# EAGLE board circuit-new (EAGLE 7.5.0)
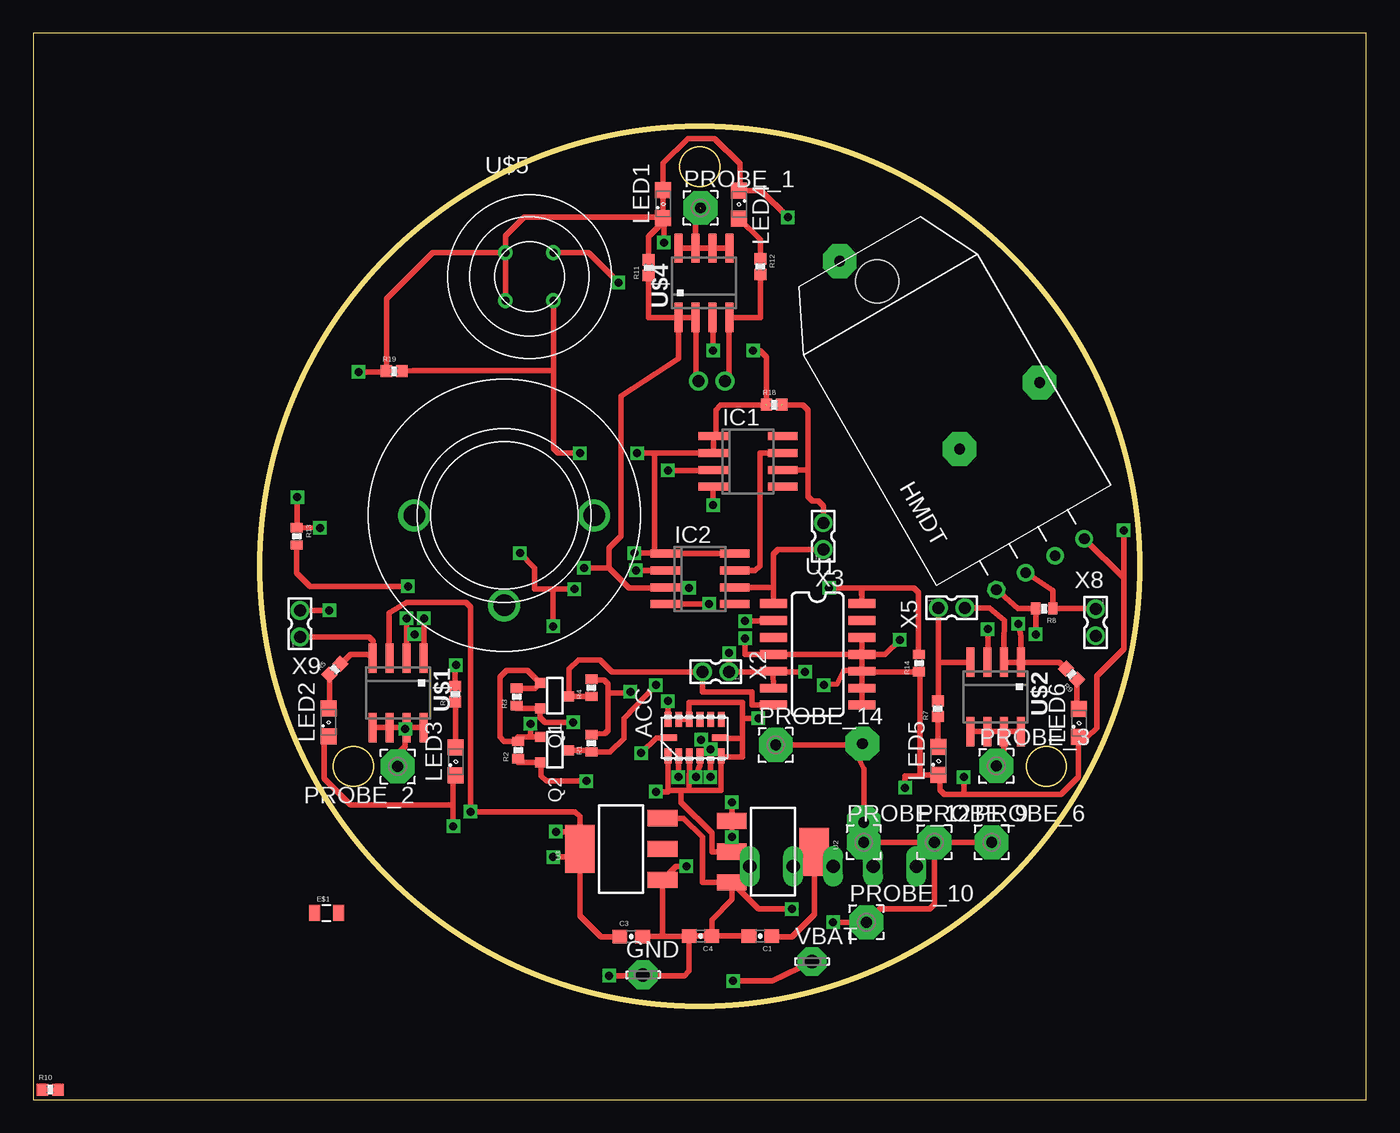
[diagram p0: board, top side]
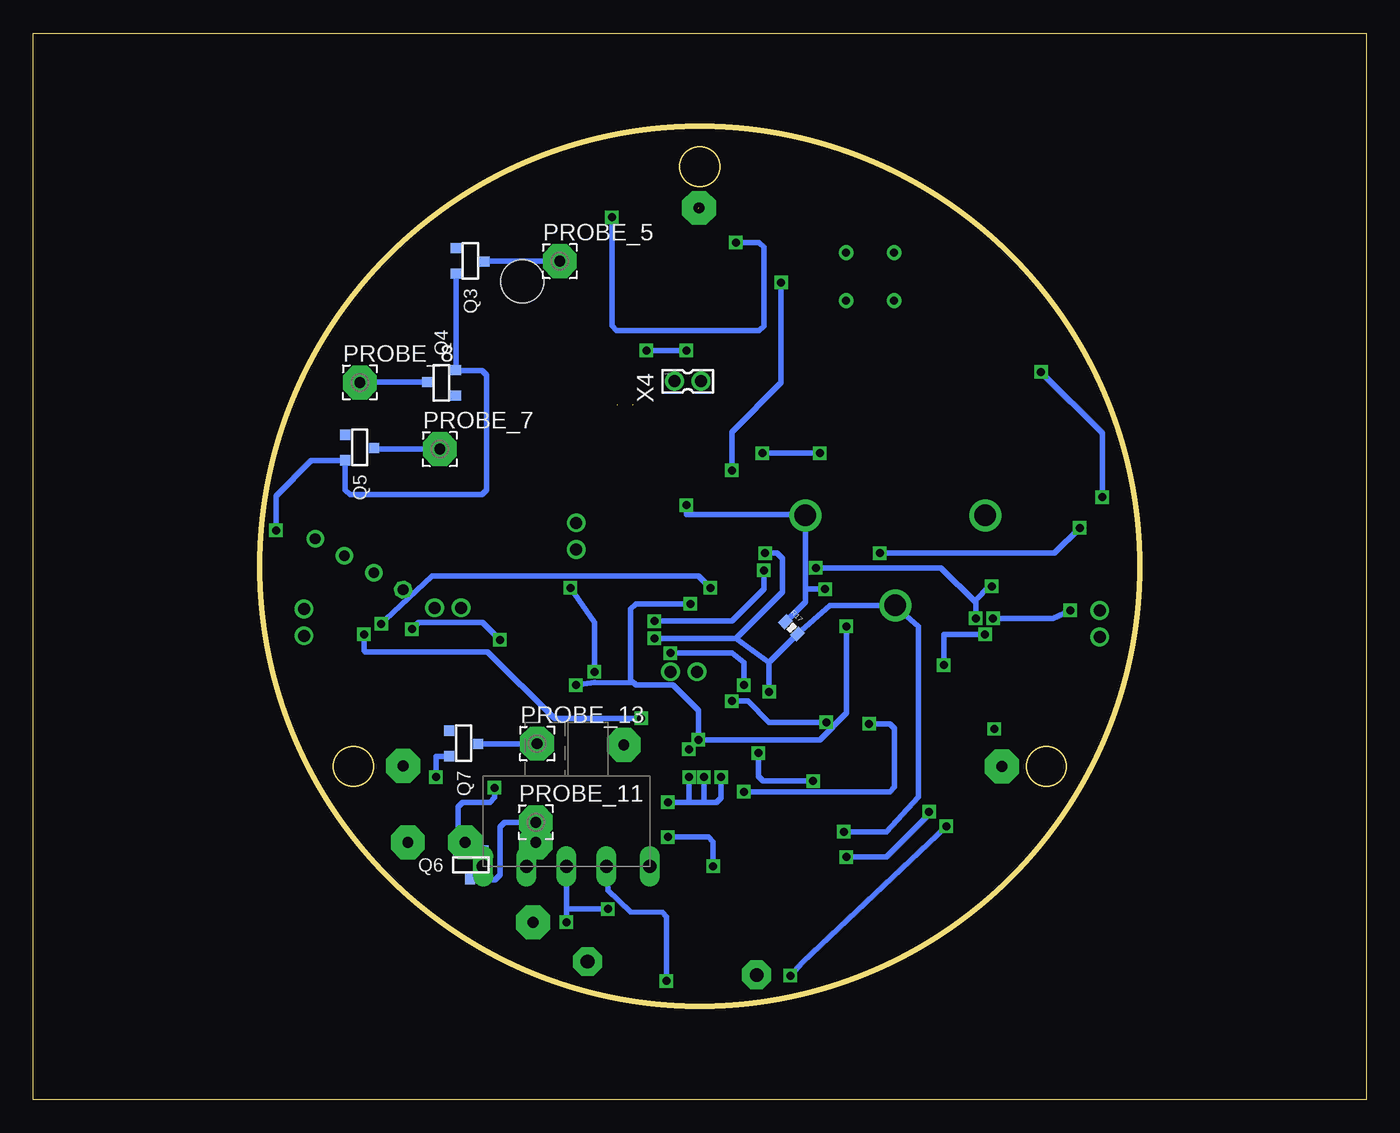
[diagram p1: board, bottom side, seen from below]

Size 100 x 80 mm. Coordinates in mm from the lower left corner, seen from the top.
Outline: 0,0 100,0 100,80 0,80 0,0
Outline: circle at 50,40 radius 33
Outline: circle at 50,70 radius 1.5
Outline: circle at 76,25 radius 1.5
Outline: circle at 24,25 radius 1.5
Copper layers (1*16): Top 0.035mm / dielectric 1.5mm / Bottom 0.035mm
Design rules "default *": minimum track width 0.5mm, minimum drill 1mm, track to track 8mil, track to pad 8mil, pad to pad 8mil, via to via 8mil, smd to smd 8mil, copper to edge 40mil, drill to drill 8mil, minimum pad ring 10mil, minimum via ring 8mil, stop-mask expansion 4mil, vias tented up to drill 0mil, thermal gap 10mil

## Footprints (pad centres in the part's own frame; a part is rotated, then mirrored left to right if it is on the bottom)
LGA_CC-14-1 = smd 1.118 x 0.5: 1 -1.371,2; 2 -1.371,1.2; 3 -1.371,0.4; 4 -1.371,-0.4; 5 -1.371,-1.2; 6 -1.371,-2; 8 1.371,-2; 9 1.371,-1.2; 10 1.371,-0.4; 11 1.371,0.4; 12 1.371,1.2; 13 1.371,2 | smd 0.5 x 1.118: 7 0,-1.871; 14 0,1.871
0603-CAP = smd 1.1 x 1: 1 -0.85,0; 2 0.85,0
0805 = smd 0.8 x 1.2: 1 -0.9,0; 2 0.9,0
LSP10 = drill 1.016 pad 2.159 octagon: MP 0,0
RHT03_DHT-22/RA = drill 0.8: DATA -1.27,0; GND 3.81,0; NULL 1.27,0 | drill 0.8 octagon: VDD -3.81,0 | hole 3.25: 0,24.5
SO08 = smd 0.6 x 2.2: 1 -1.905,-2.6; 2 -0.635,-2.6; 3 0.635,-2.6; 4 1.905,-2.6; 5 1.905,2.6; 6 0.635,2.6; 7 -0.635,2.6; 8 -1.905,2.6
SML0805 = smd 1.2 x 1.2: A 1.05,0; C -1.05,0
2,54/0,8 = drill 0.813 pad 2.54 octagon: 1 0,0
SOT-23 = smd 0.762 x 0.762: 1 -0.979,-1.101; 2 0.94,-1.101; 3 0.025,1.067
0402-RES = smd 0.7 x 0.9: 1 -0.65,0; 2 0.65,0
0402-RES' = smd 0.85 x 0.9: 1 -0.58,0; 2 0.58,0
SOIC-14 = smd 0.66 x 2.032: 1 -4.445,-3.315; 2 -3.175,-3.315; 3 -1.905,-3.315; 4 -0.635,-3.315; 5 0.635,-3.315; 6 1.905,-3.315; 7 3.175,-3.315; 8 3.175,3.315; 9 1.905,3.315; 10 0.635,3.315; 11 -0.635,3.315; 12 -1.905,3.315; 13 -3.175,3.315; 14 -4.445,3.315
SOT223 = smd 1.219 x 2.235: 1 -2.311,-3.099; 2 0,-3.099; 3 2.311,-3.099 | smd 3.6 x 2.2: 4 0,3.099
SOIC-8 = smd 0.6 x 2.2: 1 -1.905,-2.6; 2 -0.635,-2.6; 3 0.635,-2.6; 4 1.905,-2.6; 5 1.905,2.6; 6 0.635,2.6; 7 -0.635,2.6; 8 -1.905,2.6
TGS4161 = drill 0.6: 1 1.8,-1.8; 2 1.8,1.8; 3 -1.8,1.8; 4 -1.8,-1.8
O2-A2 = drill 1.6: GND 6.75,0; NC -6.75,0; VOUT 0,-6.75
SS-8 = drill 1 long: CASE_L -6.25,-3.81; CASE_R 6.25,-3.81; COM 0,-3.81; P1 -3,-3.81; P2 3,-3.81
87758-0216 = drill 0.9 pad 1.27: 1 0,-1; 2 0,1

## Placement (x,y rotation side)
ACC  ADXL375BCCZ  [LGA_CC-14-1]  49.62,27.14 90 top
C1  4.7pF  [0603-CAP]  54.54,12.27 180 top
C3  4.7pF  [0603-CAP]  44.85,12.23 0 top
C4  4.7pF  [0603-CAP]  50.06,12.27 180 top
E$1  [0805]  22,14 0 top
GND  LSP10  [LSP10]  45.74,9.35 0 top
HMDT  [RHT03_DHT-22/RA]  75.55,40.16 30 top
IC1  TLC271D  [SO08]  53.62,47.88 270 top
IC2  TLC271D  [SO08]  50.02,39.07 270 top
LED1  [SML0805]  47.25,67.19 90 top
LED2  [SML0805]  22.14,28.31 90 top
LED3  [SML0805]  31.69,25.35 90 top
LED4  [SML0805]  52.95,67.16 270 top
LED5  [SML0805]  67.91,25.4 90 top
LED6  [SML0805]  78.45,28.24 90 top
PROBE_1  [2,54/0,8]  50.06,66.9 0 top
PROBE_2  [2,54/0,8]  27.34,24.98 180 top
PROBE_3  [2,54/0,8]  72.25,25.02 0 top
PROBE_5  [2,54/0,8]  60.5,62.9 0 bottom
PROBE_6  [2,54/0,8]  71.9,19.3 0 top
PROBE_7  [2,54/0,8]  69.5,48.8 0 bottom
PROBE_8  [2,54/0,8]  75.5,53.8 0 bottom
PROBE_9  [2,54/0,8]  67.6,19.3 0 top
PROBE_10  [2,54/0,8]  62.5,13.3 0 top
PROBE_11  [2,54/0,8]  62.3,20.8 0 bottom
PROBE_12  [2,54/0,8]  62.3,19.3 0 top
PROBE_13  [2,54/0,8]  62.2,26.7 0 bottom
PROBE_14  [2,54/0,8]  55.7,26.6 0 top
Q1  [SOT-23]  39.13,30.28 270 top
Q2  [SOT-23]  39.13,26.23 270 top
Q3  [SOT-23]  67.2,62.9 270 bottom
Q4  [SOT-23]  69.4,53.8 90 bottom
Q5  [SOT-23]  75.5,48.9 270 bottom
Q6  [SOT-23]  67.2,17.6 180 bottom
Q7  [SOT-23]  67.7,26.7 270 bottom
R1  10k  [0402-RES]  41.87,26.73 90 top
R2  10k  [0402-RES]  36.37,26.22 90 top
R3  10k  [0402-RES]  36.27,30.21 90 top
R4  10k  [0402-RES]  41.87,30.9 90 top
R5  10  [0402-RES']  22.64,32.27 45 top
R6  10  [0402-RES']  31.65,30.42 90 top
R7  10  [0402-RES']  67.86,29.33 90 top
R8  10k  [0402-RES]  75.84,36.83 180 top
R9  10  [0402-RES']  77.89,31.91 135 top
R10  10  [0402-RES']  1.27,0.74 0 top
R11  10  [0402-RES']  46.16,62.41 90 top
R12  10  [0402-RES']  54.54,62.5 270 top
R13  [0402-RES]  19.77,42.26 270 top
R14  [0402-RES]  66.46,32.75 90 top
R17  [0402-RES]  43.11,35.39 315 bottom
R18  10  [0402-RES']  55.58,52.14 0 top
R19  10  [0402-RES']  27.07,54.64 0 top
U1  AD5241BRU1M-REEL7AD5241BRZ1M  [SOIC-14]  58.85,32.77 270 top
U2  [SOT223]  55.5,18.6 270 top
U3  [SOT223]  44.1,18.8 90 top
U$1  AO4606  [SOIC-8]  27.36,30.5 180 top
U$2  AO4606  [SOIC-8]  72.2,30.21 180 top
U$4  AO4606  [SOIC-8]  50.32,61.28 0 top
U$5  TGS4161  [TGS4161]  37.22,61.75 0 top
U$6  O2-A2  [O2-A2]  35.33,43.83 0 top
U$9  SS-8  [SS-8]  60,21.3 0 bottom
VBAT  LSP10  [LSP10]  58.42,10.35 0 top
X2  87758-0216  [87758-0216]  51.2,32.1 90 top
X3  87758-0216  [87758-0216]  59.27,42.27 0 top
X4  87758-0216  [87758-0216]  50.9,53.9 270 bottom
X5  87758-0216  [87758-0216]  68.9,36.9 270 top
X8  87758-0216  [87758-0216]  79.7,35.8 180 top
X9  87758-0216  [87758-0216]  20,35.7 0 top

## Library data of the parts
ACC Q3-Q7 U1-U3 U$1 U$2 U$4 U$9 = elements
C1 C3 C4 = SparkFun-Capacitors; PROD_ID: CAP-07880
E$1 R5-R7 R9-R12 R18 R19 = SparkFun-Resistors
GND VBAT = solpad
HMDT = RHT03_DHT-22_AM2302; PROD_ID: SEN-10167
IC1 IC2 = linear
LED1-LED6 = led
PROBE_1-PROBE_3 PROBE_5-PROBE_14 = wirepad
Q1 Q2 = transistors
R1-R4 R8 R13 R14 R17 = SparkFun-Passives
U$5 U$6 = datchiki
X2-X5 X8 X9 = con-molex; MPN: 87758-0216; OC_FARNELL: unknown; OC_NEWARK: 94M1513

## Nets
3.3V: ACC.1 ACC.3 ACC.6 ACC.7 ACC.11 ACC.12 C1.1 HMDT.VDD Q1.1 Q2.1 R2.2 R3.2 R8.2 U2.2 U2.4
5V: C3.1 IC1.1 IC1.2 IC2.1 IC2.8 R1.2 R4.2 R17.2 R18.1 R19.2 U1.4 U1.8 U1.9 U1.11 U3.2 U3.4 U$1.3 U$2.3 U$4.3 U$5.1 U$6.VOUT
GND: ACC.2 ACC.4 ACC.5 C1.2 C3.2 C4.2 GND.MP HMDT.GND IC1.4 IC2.4 LED1.C LED2.C LED3.C LED4.C LED5.C LED6.C Q3.2 Q4.2 Q5.2 Q6.2 Q7.2 R13.1 R14.1 R17.1 R19.1 U1.10 U2.1 U3.1 U$5.3 U$5.4 U$6.GND
N$1: LED4.A R12.1
N$2: PROBE_2.1 U$1.5 U$1.6 U$1.7 U$1.8
N$3: HMDT.DATA R8.1 X8.1
N$4: LED1.A R11.1
N$5: IC2.3 R13.2 U$1.1 U$2.1 U$4.1
N$6: R11.2 U$4.2 X4.2
N$7: R12.2 U$4.4 X4.1
N$8: LED2.A R5.1
N$9: R9.2 U$2.2 X5.2
N$10: LED3.A R6.1
N$11: R5.2 U$1.4 X9.1
N$12: LED5.A R7.1
N$13: R7.2 U$2.4 X5.1
N$14: LED6.A R9.1
N$16: PROBE_1.1 U$4.5 U$4.6 U$4.7 U$4.8
N$17: R6.2 U$1.2 X9.2
N$18: PROBE_5.1 Q3.3
N$20: IC2.6 U1.1 X3.1
N$21: PROBE_3.1 U$2.5 U$2.6 U$2.7 U$2.8
N$22: IC1.3 U$5.2
N$23: PROBE_8.1 Q4.3
N$24: IC1.6 R18.2 X3.2
N$26: IC2.2 U1.2
N$27: PROBE_7.1 Q5.3
N$28: R14.2 U1.5 U1.14
N$29: PROBE_11.1 Q6.3
N$30: PROBE_13.1 Q7.3
N$33: U$9.P2 VBAT.MP
SCL_3.3V: ACC.14 Q2.2 R2.1
SCL_5V: Q2.3 R1.1 U1.6 X2.1
SDA_3.3V: ACC.13 Q1.2 R3.1
SDA_5V: Q1.3 R4.1 U1.7 X2.2
V+: IC1.7 IC2.7
VBAT: C4.1 PROBE_6.1 PROBE_9.1 PROBE_10.1 PROBE_12.1 PROBE_14.1 U2.3 U3.3 U$9.COM

## Tracks (layer width: path | path; a pad name or v marks a point on that pad's centre or on a via)
3.3V  (via drill 0.6)
  Top 0.406: Q2.1 37.3,27.21 | 37.3,27.21 36.37,27.21 R2.2 35.33,26.87 35,27.2 35,31.7 35.5,32.2 37.09,32.2 Q1.1 37.63,30.86 R3.2 | ACC.7 51.49,27.1 53.2,27.1 | ACC.12 ACC.11 49.2,28.51 49.2,29.8 53.2,29.8 53.2,28.6 | HMDT.VDD 73.88,36.84 R8.2 v75.2,34.9 | U2.4 58.6,13.9 56.9,12.2 55.46,12.2 C1.1 | v46.7,23.1 47.62,23.1 47.62,23.2 | v37.3,28.2 37.3,27.21 | ACC.1 47.62,23.2 | U2.2 50.9,18.6 50.9,20 48.6,22.3 48.6,23.2 | ACC.3 49.2,23.2 | 49.2,23.2 48.6,23.2 | 48.6,23.2 47.62,23.2 | 49.2,23.2 51.6,23.2 51.6,25.75 ACC.6 51.62,25.7 53.2,25.7 53.2,27.1 | 53.2,27.1 53.2,28.6 | 53.2,28.6 v54.4,28.6
  Bottom 0.406: v46.7,23.1 35.75,23.1 35.4,23.45 35.4,27.85 35.75,28.2 v37.3,28.2 | v54.4,28.6 60.9,28.6 65.9,33.6 75.1,33.6 75.2,33.7 v75.2,34.9
5V  (via drill 0.6)  (1 unrouted)
  Top 0.406: R1.2 42.88,27.48 43.1,27.7 43.1,30.5 | 43.1,30.5 43.1,31.2 42.8,31.5 41.92,31.5 R4.2 | IC2.8 IC2.1 47.4,41 46.6,41 | U$1.3 26.7,33.13 26.7,36.5 28,37.3 32.45,37.3 32.8,36.95 v32.8,21.6 40.65,21.6 41,21.25 41,20.1 | 39.02,54.7 U$5.1 | 39.02,54.7 28.49,54.7 R19.2 | v39.2,20.1 41,20.1 | 41,20.1 41.7,20.1 | v44.8,30.6 44.7,30.5 43.1,30.5 | U1.8 U1.9 U1.11 | 41,18.2 41,13.8 42.6,12.2 43.97,12.2 C3.1 | 41,18.2 41,18.3 | 41,18.3 U3.4 | v51,56.2 51,58.63 U$4.3 | 40.9,18.4 41,18.3 | U1.11 U1.4 53.41,33.41 v53.4,34.6 | U1.11 62.16,34.6 | v39,18.2 41,18.2 | v54,56.2 54.5,56.2 55,55.7 55,52.1 51.55,52.1 51.2,51.75 51.2,49.78 IC1.1 IC1.2 51.02,48.5 46.6,48.5 | v45.1,41 46.6,41 | 46.6,48.5 46.6,41 | U1.11 63.91,33.41 v65,34.5 | v71.6,35.3 71.6,32.84 U$2.3 | 39.02,54.7 39.02,48.85 39.37,48.5 v41,48.5 | v45.3,48.5 46.6,48.5
  Bottom 0.406: 35.38,37.08 40.23,37.08 R17.2 44.8,32.78 | v39.2,20.1 36,20.1 33.6,22.7 33.6,35.5 35.38,37.08 | 44.8,32.78 v44.8,30.6 | U$6.VOUT 35.38,37.08 | v32.8,21.6 32.8,21.4 36,18.2 v39,18.2 | v54,56.2 v51,56.2 | v53.4,34.6 47.3,34.6 | 47.3,34.6 43.8,38.1 43.8,40.6 44.2,41 v45.1,41 | v65,34.5 66.3,35.8 71.1,35.8 v71.6,35.3 | 44.8,32.78 47.3,34.6 | v41,48.5 v45.3,48.5
GND  (via drill 0.6)
  Top 0.406: 69.8,22.9 77.1,22.9 78.4,24.2 78.4,27.1 78.49,27.19 LED6.C 79.09,27.19 79.8,27.9 79.8,31.8 81.8,33.8 81.8,39.12 | 69.8,22.9 68.35,22.9 68,23.25 68,24.35 LED5.C | LED2.C 21.8,27.26 21.8,24.1 23.8,22.1 31.5,22.1 | 31.5,22.1 31.5,24.11 LED3.C | C1.2 C4.2 | 48.4,26.1 ACC.2 48.4,25.77 v48.4,24.2 | U$5.3 29.95,63.55 26.49,60.09 R19.1 26.45,54.6 v24.4,54.6 | HMDT.GND 81.8,39.12 | v31.5,20.5 31.5,22.1 | 66.5,24.35 66.5,32.06 R14.1 62.16,32.1 U1.10 62.1,32.2 60.8,32.2 60.3,31.2 v59.3,31.1 | LED5.C 67.86,24.3 | 66.5,24.3 66.55,24.35 | 66.55,24.35 LED5.C | 66.5,24.35 66.55,24.35 | v49,17.5 48.21,17.5 U3.1 47.2,12.33 47.3,12.23 | C3.2 47.3,12.23 | 47.3,12.23 49.17,12.23 C4.2 | C4.2 49.21,9.65 48.86,9.3 45.74,9.3 | v43.2,9.3 45.74,9.3 | 45.74,9.3 GND.MP | ACC.5 50.8,25.75 | ACC.5 50.82,24.9 v50.8,24.2 | v52.4,19.7 U2.1 v52.4,22.3 | ACC.4 50.02,25.12 49.7,24.3 v49.7,24.2 | v51,44.6 51,45.98 IC1.4 | v19.8,45.2 19.8,42.93 R13.1 v21.5,42.9 | v69.8,24.2 69.8,22.9 | v65.4,23.4 65.4,24.3 66.5,24.3 | 66.5,24.3 66.5,24.35 | v81.8,42.7 81.8,39.12 | ACC.5 v50.82,26.28 v50.1,27 | v39,35.5 39,38.3 | 39,38.3 v40.6,38.3 | v50.7,37.2 50.66,37.16 IC2.4 | v36.5,41 37.6,39.9 37.6,38.3 39,38.3 | U$5.3 U$5.4 | U$5.3 35.42,64.82 36.8,66.2 47.19,66.2 LED1.C | LED1.C 47.25,65.95 47.4,65.8 | LED4.C 54.59,68.21 v56.6,66.2 | v47.3,64.3 47.3,66.14 LED1.C
  Bottom 0.406: v43.2,9.3 42.3,10.3 v31.5,20.5 | v49,17.5 49,19.35 49.35,19.7 v52.4,19.7 | v50.8,24.2 50.8,22.3 | 50.8,22.3 49.7,22.3 | 49.7,22.3 48.75,22.3 48.4,22.65 v48.4,24.2 | v49.7,24.2 49.7,22.3 | 50.8,22.3 v52.4,22.3 | 42.08,38.3 U$6.GND 42.15,43.9 51,43.9 v51,44.6 | 42.08,38.3 42.08,37.34 R17.1 | v24.4,54.6 19.8,50 v19.8,45.2 | Q7.2 69.8,25.76 v69.8,24.2 | v65.4,23.4 65.4,22.65 65.75,22.3 67.79,22.3 68.14,21.95 Q6.2 | Q3.2 Q4.2 68.3,54.7 66.35,54.7 66,54.35 66,45.75 66.35,45.4 76.25,45.4 76.6,45.75 Q5.2 79.14,47.96 81.8,45.3 v81.8,42.7 | v50.1,27 41,27 39,29 v39,35.5 | v40.6,38.3 42.08,38.3 | v50.82,26.28 v50.1,27 | v50.1,27 50.1,29.2 52,31.1 54.8,31.1 54.95,31.25 | 54.95,31.25 55.2,31.5 55.2,36.8 54.8,37.2 v50.7,37.2 | v59.3,31.1 57.9,31.3 54.95,31.25 | v21.5,42.9 23.4,41 v36.5,41 | v56.6,66.2 56.6,58.05 56.25,57.7 45.55,57.7 45.2,58.05 45.2,63.95 45.55,64.3 v47.3,64.3
N$1
  Top 0.406: R12.1 54.54,64.52 LED4.A
N$2  (via drill 0.6)
  Top 0.406: U$1.5 U$1.6 U$1.7 | U$1.7 U$1.8 | PROBE_2.1 27.34,25.94 27.9,26.5 v27.9,27.8 U$1.7
N$3
  Top 0.406: HMDT.DATA 76.49,38.19 R8.1 79.67,36.84 X8.1
N$4
  Top 0.406: R11.1 46.15,64.75 47.3,65.9 47.25,65.95 LED1.A 47.25,70.25 49.1,72.1 51.1,72.1 53,70.2 53,68.3
N$5  (via drill 0.6)
  Top 0.406: 43.2,39.9 44.7,38.4 47.42,38.4 IC2.3 47.45,38.4 v49.2,38.4 | 43.2,39.9 v41.3,39.9 | v29.3,36.1 29.3,33.13 U$1.1 | U$4.1 48.4,58.66 48.4,55.6 44.1,52.8 44.1,42.3 43.2,41.4 43.2,39.9 | U$2.1 74.1,34.8 v73.9,35.7 | R13.2 19.77,39.5 20.77,38.5 v28.1,38.5
  Bottom 0.406: v41.3,39.9 31.9,39.9 29.3,37.3 | 29.3,37.3 v29.3,36.1 | v49.2,38.4 50.1,39.3 70.1,39.3 73.6,36 v73.9,35.7 | v28.1,38.5 28.3,38.5 29.3,37.5 29.3,37.3
N$6
  Top 0.406: R11.2 46.16,58.68 U$4.2 49.7,58.66 49.7,53.9 X4.2
N$7
  Top 0.406: U$4.4 54.54,58.68 R12.2 | U$4.4 54.48,58.68 54.5,58.7 | X4.1 52.2,53.9 52.2,58.66 U$4.4
N$8
  Top 0.406: LED2.A 22.23,29.36 R5.1
N$9
  Top 0.406: R9.2 77,32.81 U$2.2 72.83,34.17 72.85,35.95 71.75,36.9 X5.2
N$10
  Top 0.406: LED3.A 31.69,29.8 R6.1
N$11
  Top 0.406: R5.2 23.08,32.68 23.8,33.4 25.16,33.4 U$1.4 25.5,33.14 25.5,34.4 25.2,34.7 X9.1
N$12
  Top 0.406: 67.5,26.8 LED5.A 67.86,26.5 R7.1
N$13
  Top 0.406: R7.2 67.9,29.95 67.9,32.8 | U$2.4 67.92,32.81 67.9,32.8 | X5.1 67.9,32.8
N$14
  Top 0.406: R9.1 78.3,29.44 LED6.A
N$16  (1 unrouted)
  Top 0.406: U$4.8 U$4.7 | U$4.7 U$4.6 U$4.5 | U$4.7 49.69,65.78 50.1,66.2 50.1,66.86
N$17  (via drill 0.6)
  Top 0.406: X9.2 v22.2,36.7 | v28,36.1 28,34.9 | 28,34.9 U$1.2 28,34.9 | 28,34.9 v28.6,34.9 | 31.7,31 R6.2 | R6.2 31.6,31 | v31.7,32.6 31.65,32.55 R6.2
  Bottom 0.406: v22.2,36.7 23.5,36.1 v28,36.1 | v28.6,34.9 31.7,34.9 v31.7,32.6
N$18
  Bottom 0.406: PROBE_5.1 66.13,62.9 Q3.3
N$20
  Top 0.406: IC2.6 55.52,38.44 U1.1 55.53,40.92 55.88,41.27 X3.1
N$21
  Top 0.406: PROBE_3.1 72.25,25.65 72.8,26.2 72.8,27.57 U$2.7 | U$2.5 U$2.6 U$2.7 | U$2.7 U$2.8
N$22  (via drill 0.6)
  Top 0.406: U$5.2 41.65,63.55 v43.9,61.3 | v47.6,47.2 50.98,47.2 IC1.3
  Bottom 0.406: v43.9,61.3 43.9,53.8 47.6,50.1 v47.6,47.2
N$23
  Bottom 0.406: Q4.3 75.5,53.83 PROBE_8.1
N$24  (1 unrouted)
  Top 0.406: 56.16,52.1 57.75,52.1 58.1,51.75 58.1,47.24 | IC1.6 58.1,47.24 | 58.1,47.24 58.1,45.25 58.45,44.9 58.92,44.9 59.27,44.55 X3.2
N$26  (via drill 0.6)
  Top 0.406: IC2.2 v45.2,39.7 | v53.4,35.9 55,35.9 55,35.95 U1.2
  Bottom 0.406: v45.2,39.7 45.2,38.3 47.6,35.9 v53.4,35.9
N$27
  Bottom 0.406: PROBE_7.1 74.43,48.8 Q5.3
N$28  (via drill 0.6)
  Top 0.406: R14.2 66.4,33.4 66.4,38.05 66.05,38.4 62.16,38.4 U1.14 62.15,38.4 v59.7,38.4 | U1.5 55.53,32.1 v57.9,32.1
  Bottom 0.406: v57.9,32.1 57.9,35.8 v59.7,38.4
N$29
  Bottom 0.406: PROBE_11.1 64.65,20.8 65,20.45 65,16.85 65.35,16.5 67.22,16.5 Q6.3
N$30
  Bottom 0.406: PROBE_13.1 65.93,26.7 Q7.3
N$33  (via drill 0.6)
  Top 0.406: v52.5,8.9 55.47,8.9 VBAT.MP
  Bottom 0.406: U$9.P2 56.9,15.7 55.2,14.1 52.78,14.05 52.5,13.71 v52.5,8.9
SCL_3.3V  (via drill 0.6)
  Top 0.406: Q2.2 36.37,25.29 R2.1 | Q2.2 | ACC.14 46.74,27.14 v45.6,26 | v41.5,23.9 38.5,23.9 38.1,24.3 38.1,25.22 Q2.2
  Bottom 0.406: v45.6,26 45.6,24.25 45.25,23.9 v41.5,23.9
SCL_5V  (via drill 0.6)
  Top 0.406: Q2.3 41.77,26.2 R1.1 | 41.79,26.2 R1.1 | U1.6 55.5,32.1 X2.1 v52.2,33.5 | R1.1 43.28,26.08 44.3,27.1 44.3,28.6 v46.7,31.1
  Bottom 0.406: v46.7,31.1 46.7,32.8 47.6,33.5 v52.2,33.5
SDA_3.3V  (via drill 0.6)
  Top 0.406: R3.1 36.27,29.34 Q1.2 38.03,28.67 38.4,28.3 v40.5,28.3 | v47.6,29.9 47.6,28.53 ACC.13
  Bottom 0.406: v40.5,28.3 44.8,28.3 46.4,29.9 v47.6,29.9
SDA_5V
  Top 0.406: R4.1 Q1.3 40.2,32.3 40.9,33 42.5,33 43.4,32.1 X2.2 50.2,30.6 53.9,30.6 53.9,29.59 U1.7
V+
  Top 0.406: IC2.7 54.15,39.7 54.5,40.05 54.5,48.52 IC1.7
VBAT  (via drill 0.6)
  Top 0.406: PROBE_9.1 67.6,14.65 67.25,14.3 63.5,14.3 PROBE_10.1 v60,13.3 | PROBE_9.1 PROBE_6.1 | PROBE_14.1 61.4,26.6 62.3,24.8 PROBE_12.1 PROBE_9.1 | U3.3 48.79,21.11 50.2,19.7 50.2,16.29 U2.3 | C4.1 50.9,13.5 52.4,15 U2.3 | U2.3 54.39,14.3 v56.9,14.3
  Bottom 0.406: U$9.COM 60,14.3 | 60,14.3 v60,13.3 | v56.9,14.3 60,14.3